# Altium PCB rhd2132_20250418.PcbDoc
Units mm, origin at the board's own origin, x right, y up, seen from the top; angles counter-clockwise.
Board outline 13 x 14.5 mm, 6 copper layers (Top Layer, GND1, sig1, PWR, GND2, Bottom Layer), stack 0.958 mm thick; 57 components, 57 nets, 310 pads, 151 vias.
Unrouted connection lines stored in the file: 21.
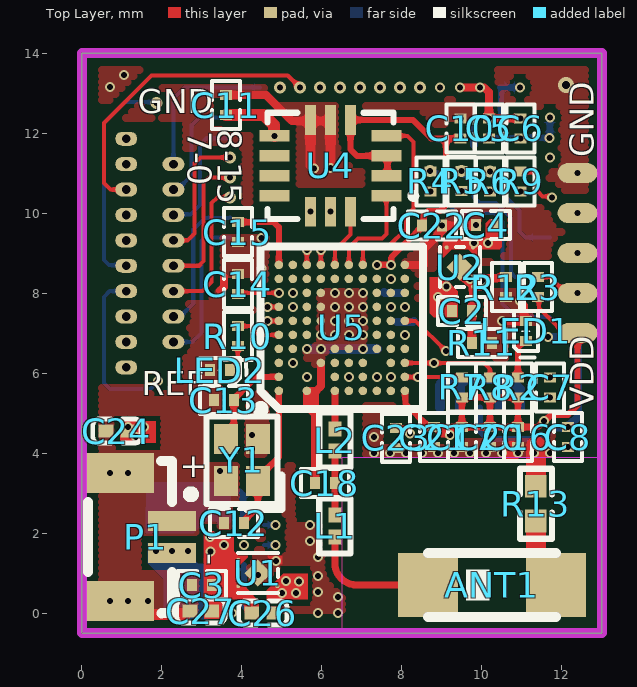
[diagram p0: Top Layer view]
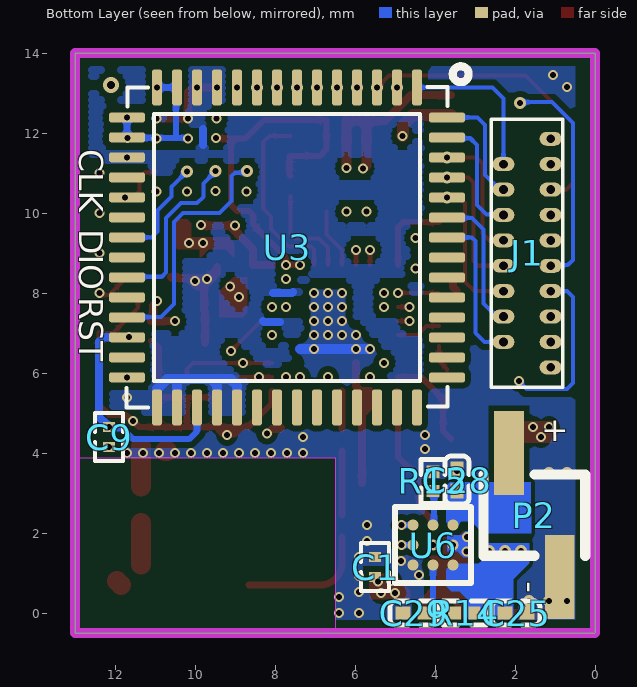
[diagram p1: Bottom Layer view, seen from below]
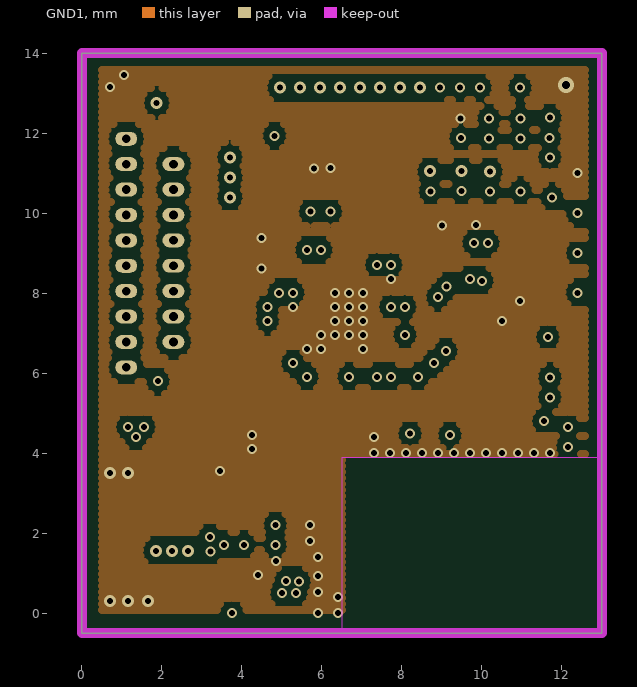
[diagram p2: GND1]
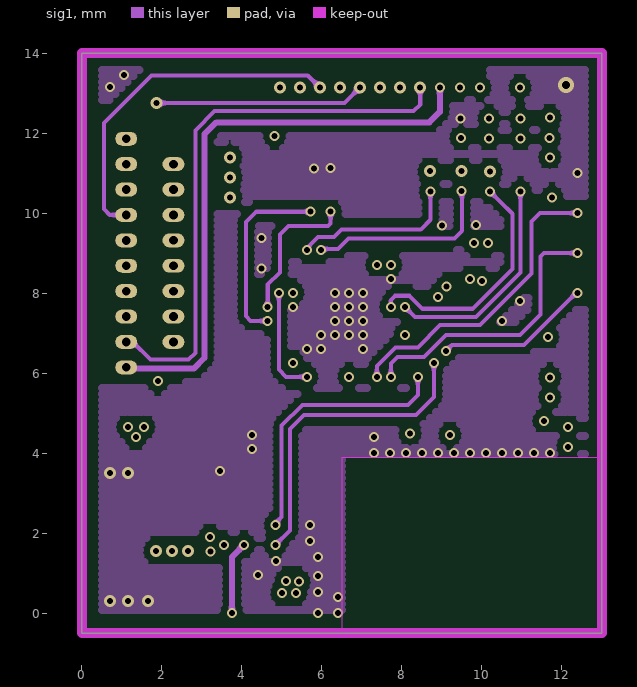
[diagram p3: sig1]
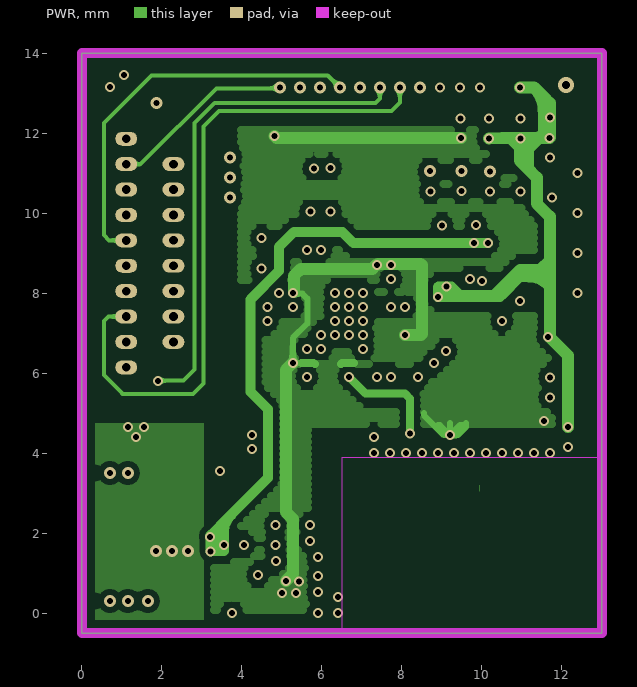
[diagram p4: PWR]
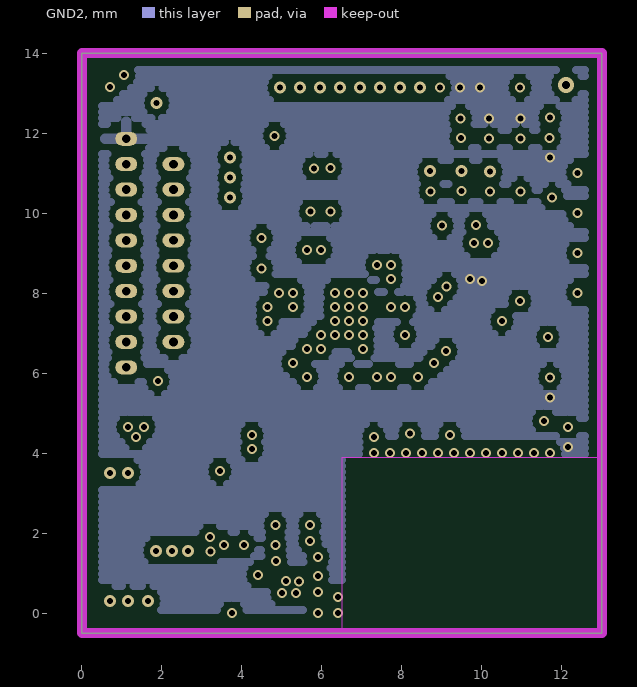
[diagram p5: GND2]
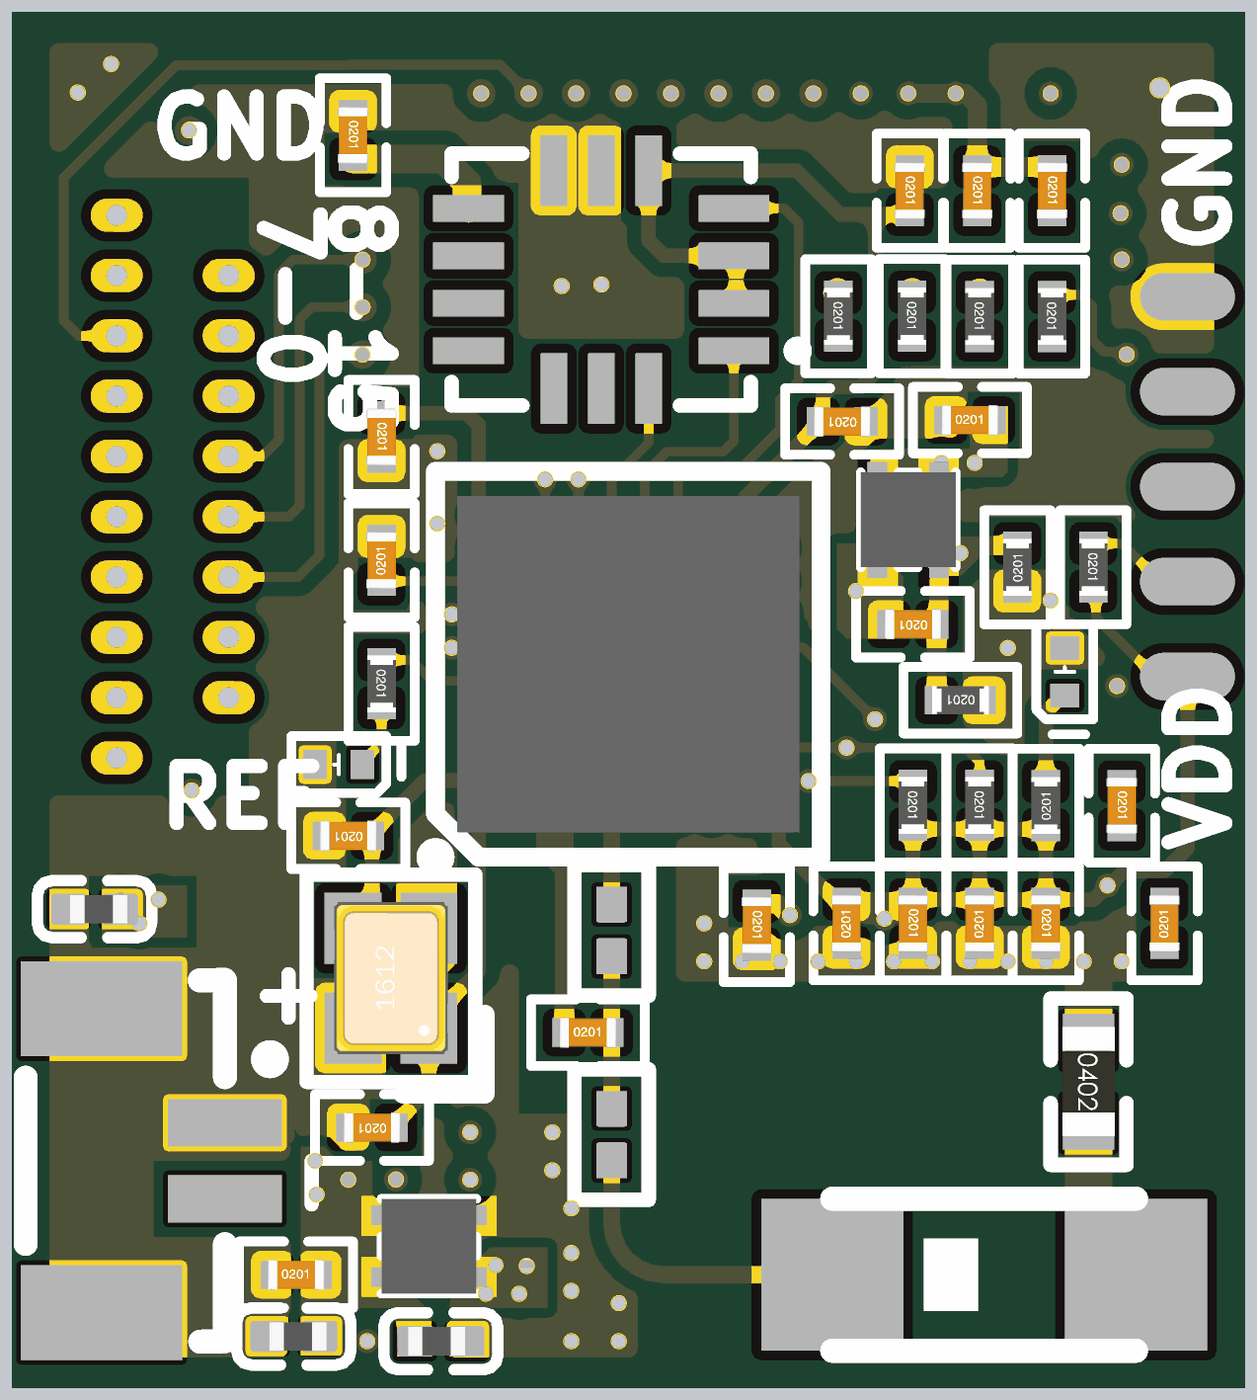
[diagram p6: 3D render of the assembled board from above, using the file's embedded part models]
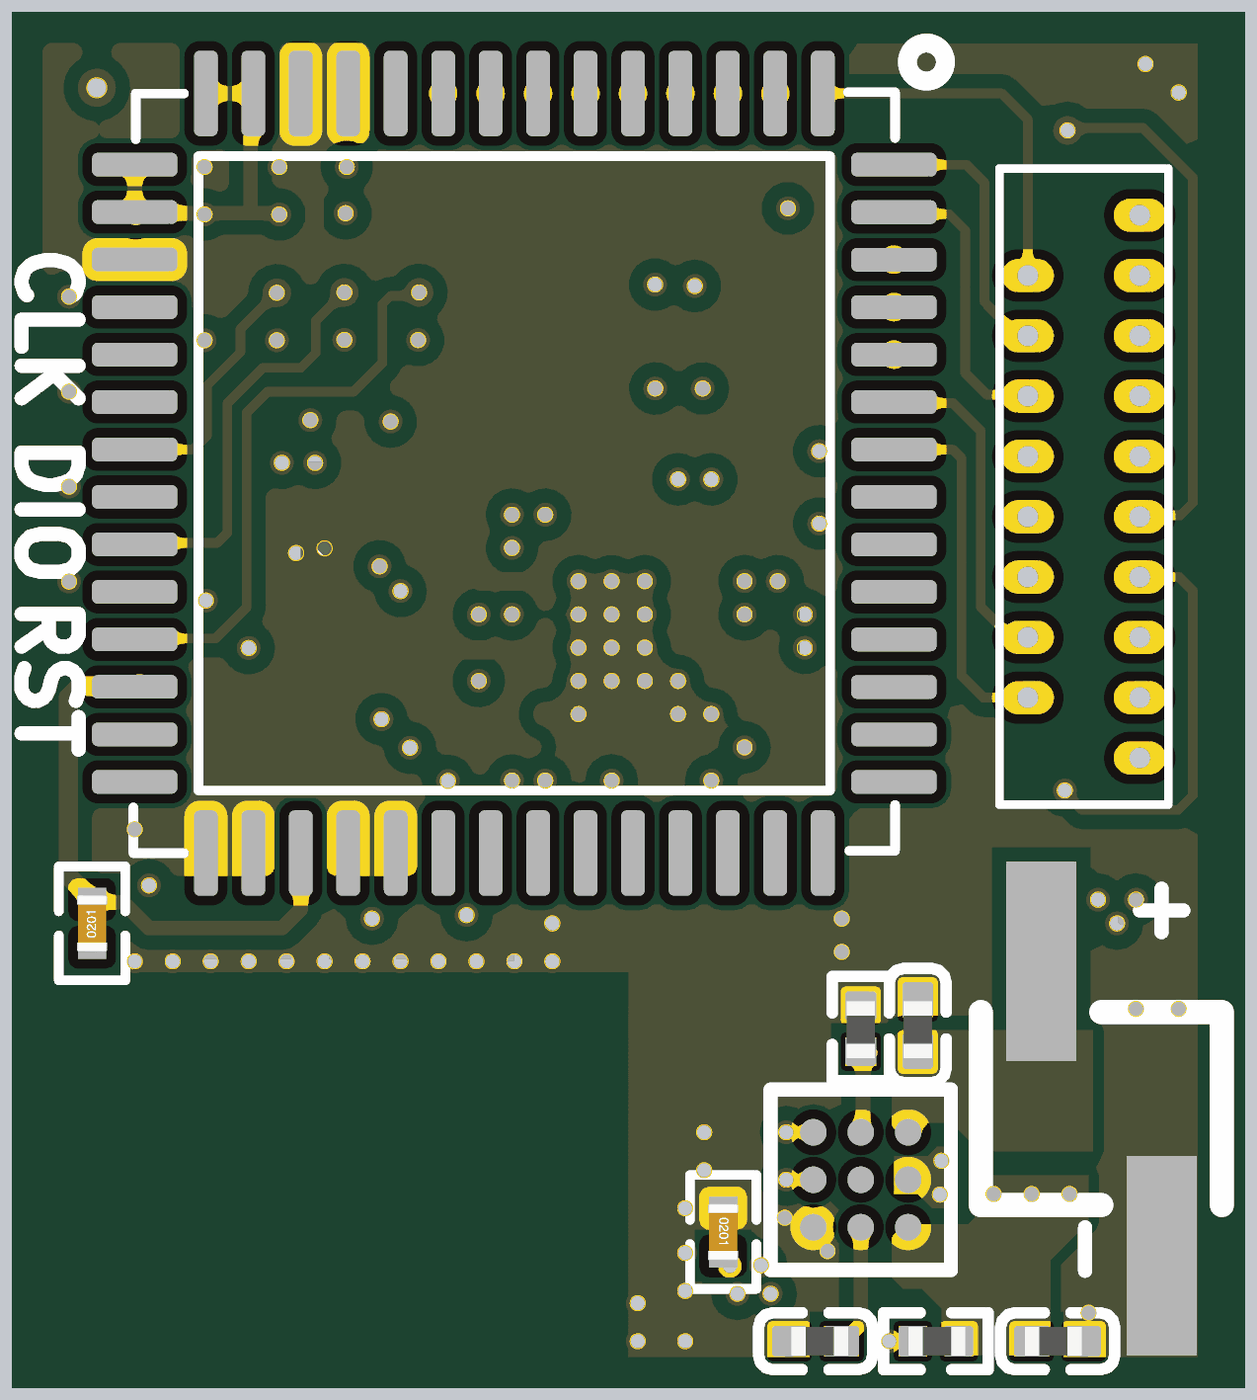
[diagram p7: 3D render of the assembled board from below, using the file's embedded part models]

## Layer stack, top to bottom
Top Solder: solder mask 0.0102, Solder Resist, Dk 3.5
Top Layer: signal copper 0.0356
Dielectric 2: prepreg 0.0711, PP-006, Dk 4.1
GND1: signal copper 0.035
Dielectric 6: prepreg 0.0711, PP-006, Dk 4.1
sig1: signal copper 0.035
Dielectric 4: prepreg 0.0711, PP-006, Dk 4.1
Dielectric 1: dielectric 0.32, FR-4, Dk 4.8
Dielectric 5: prepreg 0.0711, PP-006, Dk 4.1
PWR: signal copper 0.035
Dielectric 7: prepreg 0.0711, PP-006, Dk 4.1
GND2: signal copper 0.035
Dielectric 3: prepreg 0.0711, PP-006, Dk 4.1
Bottom Layer: signal copper 0.0356
Bottom Solder: solder mask 0.0102, Solder Resist, Dk 3.5

## Board outline
0,-0.5 13,-0.5 13,14 0,14

## Design rules (kind name [scope] priority, off if disabled: settings)
Clearance Clearance_1 [All vs IsKeepOut] p1: gap=0.2 ignorepadtopadclearanceinfootprint=FALSE
Clearance [All] p2: gap=0.102 ignorepadtopadclearanceinfootprint=FALSE except(0.1: Via-Via; 0.15: Arc-Poly Track-Poly SMDPad-Poly THPad-Poly Via-Poly Poly-Poly)
DiffPairsRouting [All] p1: maxlimit=0.254 minlimit=0.203 mostfreqgap=0.203 toplayer_minwidth=0.152 toplayer_maxwidth=0.508 toplayer_prefwidth=0.381 midlayer1_minwidth=0.152 midlayer1_maxwidth=0.508 midlayer1_prefwidth=0.381 midlayer2_minwidth=0.152 midlayer2_maxwidth=0.508 midlayer2_prefwidth=0.381 midlayer3_minwidth=0.152 midlayer3_maxwidth=0.508 midlayer3_prefwidth=0.381 midlayer4_minwidth=0.152 midlayer4_maxwidth=0.508 midlayer4_prefwidth=0.381 bottomlayer_minwidth=0.152 bottomlayer_maxwidth=0.508 bottomlayer_prefwidth=0.381 maxuncoupledlength=12.7
HoleToHoleClearance [All] p1: gap=0.152 allowstackedmicrovias=TRUE
MinimumSolderMaskSliver [All] p1: minsoldermaskwidth=0
PlaneConnect [All] p1: planeconnectstyle=Direct reliefexpansion=0.508 reliefentries=4 reliefconductorwidth=0.254 reliefairgap=0.254
PolygonConnect [All] p1: thpad.connectstyle=Relief thpad.reliefconductorwidth=0.254 thpad.reliefentries=4 thpad.polygonreliefangle="90 Angle" thpad.airgapwidth=0.254 smdpad.connectstyle=Direct smdpad.reliefconductorwidth=0.254 smdpad.reliefentries=4 smdpad.polygonreliefangle="90 Angle" smdpad.airgapwidth=0.254 via.connectstyle=Direct via.reliefconductorwidth=0.254 via.reliefentries=4 via.polygonreliefangle="90 Angle" via.airgapwidth=0.254
RoutingVias [All] p1: holewidth=0.711 width=1.27 viastyle="Through Hole" minholewidth=0.1 minwidth=0.2 maxholewidth=0.711 maxwidth=1.27
SilkToSilkClearance [All] p1: silktosilkclearance=0
SilkToSolderMaskClearance [IsPad] p1: minsilkscreentomaskgap=0 clearancetoexposedcopper=TRUE
SolderMaskExpansion [All] p1: expansion=0.102
Width [All] p1: maxlimit=2.54 minlimit=0.102 preferedwidth=0.381
24 further rules are at their usual default settings.

## Classes and differential pairs
component class IMU: C10 C11 U4
component class rhd2132: C5 C6 C7 C8 C9 J1 U3
component class Power: C1 C2 C3 C4 C24 C25 C26 C27 C28 C29 LED1 P1 P2 R2 R11 R12 R13 R14 R15 u1 U2 U6
component class nrf52840_wlcsp: ANT1 C12 C13 C14 C15 C16 C17 C18 C20 C21 C22 C23 L1 L2 LED2 R3 R4 R5 R6 R7 R8 R9 R10 U5 Y1

## Components (designator, comment, footprint, x,y, rotation, side; value= is the part's Value field where it differs from the comment)
ANT1 "ANT1" ANT-SMD_2P-L3.20-W1.60 10.25,0.7 r0 top
C1 "1uF" "C 0201_L" 5.5,1.15 r270 bottom
C2 "1uF" "C 0201_L" 9.5,7.55 r180 top
C3 "1uF" "C 0201_L" 3,0.7 r0 top
C4 "1uF" "C 0201_L" 10.1,9.7 r0 top
C5 "0.1uF/16V" "C 0201_L" 10.177,12.116 r270 top
C6 "1uF/16V" "C 0201_L" 10.965,12.116 r270 top
C7 "10nF" "C 0201_L" 11.7,5.641 r270 top
C8 "0.1uF/16V" "C 0201_L" 12.15,4.4 r90 top
C9 "0.1uF/16V" "C 0201_L" 12.15,4.4 r90 bottom
C10 "100nF" "C 0201_L" 9.466,12.116 r270 top
C11 "100nF" "C 0201_L" 3.6,12.7 r270 top
C12 "12pF" "C 0201_L" 3.8,2.25 r180 top
C13 "12pF" "C 0201_L" 3.55,5.323 r180 top
C14 "1.0uF" "C 0201_L" 3.9,8.224 r90 top
C15 "0.1uF" "C 0201_L" 3.9,9.523 r270 top
C16 "0.1uF" "C 0201_L" 10.9,4.4 r270 top
C17 "1.0uF" "C 0201_L" 9.5,4.4 r270 top
C18 "1.0pF" "C 0201_L" 6.075,3.25 r0 top
C20 "4.7uF" "C 0201_L" 10.203,4.4 r90 top
C21 "0.1uF" "C 0201_L" 8.8,4.4 r90 top
C22 "0.1uF" "C 0201_L" 8.754,9.685 r180 top
C23 "820pF" "C 0201_L" 7.854,4.382 r270 top
C24 "4.7uF" 0201(C) 1.15,4.55 r180 top
C25 "0.1uF" 0201(C) 2.25,0 r180 bottom
C26 "4.7uF" 0201(C) 4.25,0 r0 top
C27 "0.1uF" 0201(C) 3.25,0.05 r180 top
C28 "2.2uF/35V" 0201(C) 3.45,3.05 r90 bottom
C29 "0.1uF" 0201(C) 4.251,0 r0 bottom
J1 "B79038" B79038 1.7,9 r270 bottom
L1 "4.7nH" L0201 6.325,2.176 r270 top
L2 "4.7nH" L0201 6.325,4.326 r270 top
LED1 "RED" "LED-SMD_L0.7-W0.4-RD_BLUE - duplicate" 11.1,7.05 r90 top
LED2 "RED" "LED-SMD_L0.7-W0.4-RD_BLUE - duplicate" 3.45,6.073 r180 top
P1 "power" "CONN-SMD_SM02B-SURS-TF-LF-SN - duplicate" 1.35,1.9 r270 top
P2 "power" HDR-SMD_2P-P1.27-V-M-LS4.2-R1 1.515,2.45 r0 bottom
R2 "10K" "R 0201_L" 10.9,5.641 r90 top
R3 "100K" "R 0201_L" 11.4,8.15 r270 top
R4 "33o" "R 0201_L" 8.714,10.793 r270 top
R5 "33o" "R 0201_L" 9.492,10.795 r270 top
R6 "33o" "R 0201_L" 10.203,10.791 r270 top
R7 "10K" "R 0201_L" 9.5,5.643 r270 top
R8 "10K" "R 0201_L" 10.203,5.643 r270 top
R9 "33o" "R 0201_L" 10.965,10.791 r270 top
R10 "10K" "R 0201_L" 3.9,6.923 r270 top
R11 "0R" "R 0201_L" 10,6.75 r180 top value=10K
R12 "0R" "R 0201_L" 10.6,8.15 r90 top value=10K
R13 "0R" 0402(R) 11.35,3.166 r270 top value=10K
R14 "NC" 0201(R) 3.017,0 r0 bottom value=100
R15 "NTC-10K" 0201(R) 4.05,3.05 r90 bottom value=100
U1 "TPS7A2033PDQNR" X2SON-0.4 4.4,1 r180 top
U2 "TPS7A2033PDQNR" X2SON-0.4 9.45,8.65 r90 top
U3 "RHD2132" QFN-56-9mm 4.45,13.14 r270 bottom locked
U4 "LSM6DS3TR" LAG-14 7.613,10.43 r180 top
U5 "NRF52840-CKAA-R7" BGA94C35P10X10_354X361X51 6.5,7.129 r90 top
U6 "MP2710GC-0000" WLCSP3*3-P0.5mm 4.05,1.7 r270 bottom
Y1 "32MHz" "OSC 1612-4P" 4,3.823 r90 top

## Footprints (in the part's own frame and the unit in brackets; to place one, negate y for a bottom-side part, rotate by r counter-clockwise, add the part's x,y. Pads: shape width x height; smd on the part's side, far side on the other; paste and mask are expansions set on the pad)
0201(C) [mm]
  rect 0.368x0.324 smd paste-100 mask+0.051: 1(0,0) 2(0.549,0)
  silkscreen extent -0.33,-0.3 0.88,0.3, body extent -0.07,-0.15 0.53,0.15, height 0.33
0201(R) [mm]
  rect 0.303x0.324 smd paste-100 mask+0.051: 1(0,0) 2(0.483,0)
  silkscreen extent -0.31,-0.3 0.79,0.3, body extent -0.07,-0.15 0.53,0.15, height 0.33
0402(R) [mm]
  rect 0.566x0.54 smd mask+0.051: 1(0,0) 2(0.866,0)
  silkscreen extent -0.44,-0.4 1.31,0.4, body extent -0.14,-0.27 1.01,0.28, height 0.41
ANT-SMD_2P-L3.20-W1.60 [mm]
  rect 1.5x1.6 smd: 1(-1.6,0) 2(1.6,0)
  silkscreen extent -1.6,-0.8 1.6,0.8
B79038 [mm]
  oval 0.35x0.55 hole 0.22: 1(-2.857,0.59) 2(-2.222,-0.59) 3(-2.222,0.59) 4(-1.588,-0.59) 5(-1.587,0.59) 6(-0.953,-0.59) 7(-0.952,0.59) 8(-0.318,-0.59) 9(-0.317,0.59) 10(0.317,-0.59) 11(0.318,0.59) 12(0.952,-0.59) 13(0.953,0.59) 14(1.588,-0.59) 15(1.588,0.59) 16(2.223,-0.59) 17(2.223,0.59) 18(2.858,0.59)
  silkscreen extent -3.35,-0.89 3.35,0.89
BGA94C35P10X10_354X361X51 [mm]
  round 0.212 smd mask+0.025: A1(-1.575,1.575) A2(-1.225,1.575) A3(-0.875,1.575) A4(-0.525,1.575) A5(-0.175,1.575) A6(0.175,1.575) A7(0.525,1.575) A8(0.875,1.575) A9(1.225,1.575) A10(1.575,1.575) B3(-0.875,1.225) B4(-0.525,1.225) B5(-0.175,1.225) B6(0.175,1.225) B7(0.525,1.225) B8(0.875,1.225) B9(1.225,1.225) B10(1.575,1.225) C1(-1.575,0.875) C2(-1.225,0.875) C4(-0.525,0.875) C5(-0.175,0.875) C6(0.175,0.875) C7(0.525,0.875) C8(0.875,0.875) C9(1.225,0.875) C10(1.575,0.875) D3(-0.875,0.525) D4(-0.525,0.525) D5(-0.175,0.525) D6(0.175,0.525) D7(0.525,0.525) D8(0.875,0.525) D9(1.225,0.525) D10(1.575,0.525) E1(-1.575,0.175) E2(-1.225,0.175) E3(-0.875,0.175) E4(-0.525,0.175) E5(-0.175,0.175) E6(0.175,0.175) E7(0.525,0.175) E8(0.875,0.175) E9(1.225,0.175) E10(1.575,0.175) F1(-1.575,-0.175) F2(-1.225,-0.175) F3(-0.875,-0.175) F4(-0.525,-0.175) F5(-0.175,-0.175) F6(0.175,-0.175) F7(0.525,-0.175) F8(0.875,-0.175) F9(1.225,-0.175) F10(1.575,-0.175) G1(-1.575,-0.525) G2(-1.225,-0.525) G3(-0.875,-0.525) G4(-0.525,-0.525) G5(-0.175,-0.525) G6(0.175,-0.525) G7(0.525,-0.525) G8(0.875,-0.525) G9(1.225,-0.525) G10(1.575,-0.525) H1(-1.575,-0.875) H2(-1.225,-0.875) H4(-0.525,-0.875) H5(-0.175,-0.875) H6(0.175,-0.875) H7(0.525,-0.875) H8(0.875,-0.875) H9(1.225,-0.875) H10(1.575,-0.875) J1(-1.575,-1.225) J2(-1.225,-1.225) J3(-0.875,-1.225) J4(-0.525,-1.225) J5(-0.175,-1.225) J6(0.175,-1.225) J7(0.525,-1.225) J8(0.875,-1.225) J9(1.225,-1.225) J10(1.575,-1.225) K1(-1.575,-1.575) K2(-1.225,-1.575) K3(-0.875,-1.575) K4(-0.525,-1.575) K5(-0.175,-1.575) K6(0.175,-1.575) K7(0.525,-1.575) K8(0.875,-1.575) K9(1.225,-1.575) K10(1.575,-1.575)
  silkscreen extent -2.13,-2.03 2.03,2.13, body extent -1.77,-1.8 1.77,1.8, height 0.51
"C 0201_L" [mm] "无极性贴片电容                               淘宝ID:黄晶宝石"
  rect 0.25x0.3 smd: 1(-0.25,0) 2(0.25,0)
  silkscreen extent -0.6,-0.35 0.6,0.35, body extent -0.3,-0.16 0.3,0.16, height 0.31
"CONN-SMD_SM02B-SURS-TF-LF-SN - duplicate" [mm]
  rect 1x1.7 smd paste+0 mask+0.051: 0(-1.6,-0.4) 0(1.6,-0.4)
  rect 0.5x1.2 smd paste+0 mask+0.051: 1(-0.4,0.9) 2(0.4,0.9)
  silkscreen extent -1.91,-1.2 1.91,1.47
HDR-SMD_2P-P1.27-V-M-LS4.2-R1 [mm]
  rect 0.74x2.1 smd mask+0: 1(-0.635,1.55) 2(0.635,-1.55)
  silkscreen extent -1.27,-1.02 1.27,1.02
L0201 [mm]
  rect 0.368x0.324 smd mask+0.051: 1(-0.274,0) 2(0.274,0)
  silkscreen extent -0.69,-0.39 0.69,0.39
LAG-14 [mm]
  rect 0.745x0.28 smd: 1(0,0) 2(0,-0.5) 3(0,-1) 4(0,-1.5) 8(2.795,-1.5) 9(2.795,-1) 10(2.795,-0.5) 11(2.795,0)
  rect 0.28x0.745 smd: 5(0.898,-1.898) 6(1.398,-1.898) 7(1.898,-1.898) 12(1.898,0.397) 13(1.398,0.397) 14(0.898,0.397)
  silkscreen extent -0.75,-2.08 2.97,0.58
"LED-SMD_L0.7-W0.4-RD_BLUE - duplicate" [mm]
  rect 0.25x0.305 smd mask+0.05: 1(-0.25,0) 2(0.25,0)
  silkscreen extent -0.66,-0.3 0.5,0.3
"OSC 1612-4P" [mm] "1.6*1.2*0.35mm（长宽高）                    淘宝ID:黄晶宝石"
  rect 0.75x0.6 smd: 1(-0.525,-0.4) 2(0.525,-0.4) 3(0.525,0.4) 4(-0.525,0.4)
  silkscreen extent -1.22,-0.99 1.09,0.89, body extent -0.8,-0.6 0.8,0.6, height 0.35
QFN-56-9mm [mm]
  rrect50% 0.9x0.25 smd: 1(0,0) 2(0,-0.5) 3(0,-1) 4(0,-1.5) 5(0,-2) 6(0,-2.5) 7(0,-3) 8(0,-3.5) 9(0,-4) 10(0,-4.5) 11(0,-5) 12(0,-5.5) 13(0,-6) 14(0,-6.5) 29(8,-6.5) 30(8,-6) 31(8,-5.5) 32(8,-5) 33(8,-4.5) 34(8,-4) 35(8,-3.5) 36(8,-3) 37(8,-2.5) 38(8,-2) 39(8,-1.5) 40(8,-1) 41(8,-0.5) 42(8,0)
  rrect50% 0.25x0.9 smd: 15(0.75,-7.25) 16(1.25,-7.25) 17(1.75,-7.25) 18(2.25,-7.25) 19(2.75,-7.25) 20(3.25,-7.25) 21(3.75,-7.25) 22(4.25,-7.25) 23(4.75,-7.25) 24(5.25,-7.25) 25(5.75,-7.25) 26(6.25,-7.25) 27(6.75,-7.25) 28(7.25,-7.25) 43(7.25,0.75) 44(6.75,0.75) 45(6.25,0.75) 46(5.75,0.75) 47(5.25,0.75) 48(4.75,0.75) 49(4.25,0.75) 50(3.75,0.75) 51(3.25,0.75) 52(2.75,0.75) 53(2.25,0.75) 54(1.75,0.75) 55(1.25,0.75) 56(0.75,0.75)
  silkscreen extent -0.53,-7.26 8,1.29
"R 0201_L" [mm] "1/20W贴片电阻        淘宝ID:黄晶宝石"
  rect 0.25x0.3 smd: 1(-0.25,0) 2(0.25,0)
  silkscreen extent -0.6,-0.35 0.6,0.35, body extent -0.3,-0.15 0.3,0.15, height 0.23
WLCSP3*3-P0.5mm [mm]
  round 0.28 smd: A1(-0.5,0.5) A2(0,0.5) A3(0.5,0.5) B1(-0.5,0) B2(0,0) B3(0.5,0) C1(-0.5,-0.5) C2(0,-0.5) C3(0.5,-0.5)
  silkscreen extent -0.95,-0.95 0.95,0.95
X2SON-0.4 [mm]
  round 0.1 smd mask+0: 1(-0.49,0.33) 2(-0.49,-0.33) 3(0.49,-0.33) 4(0.49,0.33)
  rect 0.48x0.48 smd rot 45: 2(0,0)
  Top Layer region: -0.61,0.22 -0.61,0.43 -0.25,0.43 -0.25,0.4 -0.43,0.22
  Top Layer region: 0.61,0.22 0.61,0.43 0.25,0.43 0.25,0.4 0.43,0.22
  Top Layer region: -0.61,-0.22 -0.61,-0.43 -0.25,-0.43 -0.25,-0.4 -0.43,-0.22
  Top Layer region: 0.61,-0.22 0.61,-0.43 0.25,-0.43 0.25,-0.4 0.43,-0.22
  silkscreen extent -0.5,-0.5 0.5,0.5, body extent -0.5,-0.5 0.5,0.5, height 0.34

## Part data
ANT1: "PCB板载天线", BOM名称=PCB板载天线, 技术支持，联系售后=https://shop463601444.taobao.com, 版权归属="封装库来自淘宝 ID：黄晶宝石"
C1 C2 C3 C4 C5 C6 C7 C8 C9 C10 C11 C18: library part C, "贴片电容", BOM名称=无极性贴片电容
C12 C13: library part "CAP CER 12PF 50V C0G/NP0 0402", "CAP CER 12PF 50V C0G/NP0 0402", Manufacturer=YAGEO, Manufacturer Part Number=CC0402GRNPO9BN120, Package=0402, Supplier Part Number 1=311-3609-1-ND, Height=0.55mm, Supplier 1=Digi-Key
C14 C17: library part "CAP CER 1UF 16V X7R 0603", "CAP CER 1UF 16V X7R 0603", Manufacturer=KEMET, Manufacturer Part Number=C0603C105K4RAC7867, Package=0402, Supplier Part Number 1=399-C0603C105K4RAC7867CT-ND, Height=0.9mm, Supplier 1=Digi-Key
C15 C16 C21 C22: library part "CAP CER 0.1UF 6.3V X7R 0201", "CAP CER 0.1UF 6.3V X7R 0201", Manufacturer=YAGEO, Manufacturer Part Number=CC0201KRX7R5BB104, Package=0402, Supplier Part Number 1=13-CC0201KRX7R5BB104CT-ND, Height=0.33mm, Supplier 1=Digi-Key
C20: library part "CAP CER 4.7UF 6.3V X7R 0603", "CAP CER 4.7UF 6.3V X7R 0603", Manufacturer="Taiyo Yuden", Manufacturer Part Number=JMK107BB7475KA-T, Package=0402, Supplier Part Number 1=587-5870-1-ND, Height=1.0mm, Supplier 1=Digi-Key
C23: library part "CAP CER 820PF 25V X7R 0201", "CAP CER 820PF 25V X7R 0201", Manufacturer=YAGEO, Manufacturer Part Number=CC0201KRX7R8BB821, Package=0201, Supplier Part Number 1=311-3698-1-ND, Height=0.33mm, Supplier 1=Digi-Key
C24 C25 C26 C27 C28 C29: library part CAP
J1: library part CON_A79015-001-18PIN, LatestRevisionDate=17-Jul-2002, LatestRevisionNote="Re-released for DXP Platform.", Publisher="Altium Limited"
L1 L2: library part L, "小功率贴片电感", BOM名称=小功率贴片电感
LED1 LED2: library part LED-SMD, "贴片LED", BOM名称=贴片LED, Color=RED
R2 R3 R4 R5 R6 R7 R8 R9 R10 R11 R12: library part R, "贴片电阻", BOM名称=贴片电阻
R13: library part R, "贴片电阻 OR", BOM名称=贴片电阻
R14 R15: library part "Res Semi", "Semiconductor Resistor", LatestRevisionDate=17-Jul-2002, LatestRevisionNote="Re-released for DXP Platform.", PackageDescription="Axial Device, Thru-Hole; 2 Leads; 0.5 in Pin Spacing", PackageReference=AXIAL-0.5, Published=8-Jun-2000, Publisher="Altium Limited"
U1 U2: library part IC_TPS7A2033PDQNR, "TPS7A2033PDQNR/X2SON"
U5: "Advanced Bluetooth 5, Thread and Zigbee multiprotocol SoC", Manufacturer="Nordic Semiconductor", Supplier Part Number 1=949-NRF52840-CKAA-R7, Category="RF Receivers, Transceivers", Manufacturer Part Number=NRF52840-CKAA-R7, Pricing 1="1=6.69000, 10=6.04000, 50=5.76000, 100=5.00000, 1000=5.00000, 10000=5.00000 (USD)", RoHS=Yes, Supplier 1=Mouser
U6: library part MP2710
Y1: library part XTAL_ECS-320-8-37BQ-CKY-TR, "Crystal 32MHz 8pF ±10ppm ±10ppm 4-Pin Miniature CSMD T/R", Manufacturer="ECS International", Manufacturer Part Number=ECS-320-8-37BQ-CKY-TR, Supplier Part Number 1=50-ECS-320-8-37BQ-CKY-CT-ND, Pricing 1="1=0.57000, 10=0.47700, 50=0.42960, 100=0.38180, 500=0.36270 (USD)", RoHS=No, Stock 1=8978, Supplier 1=Digi-Key

## Free pads (board coordinates)
  oval 1x0.5 smd: 2(12.393,7) 2(12.393,8) 2(12.393,9) 2(12.393,10) 2(12.393,11)

## Via types
v1: diameter 0.25, hole 0.15, Top Layer to Bottom Layer, tented both sides, 127 vias
v2: diameter 0.3, hole 0.15, Top Layer to Bottom Layer, tented both sides, 23 vias
v3: diameter 0.4, hole 0.2, Top Layer to Bottom Layer, tented both sides, 1 vias

## Nets (pads, with @x,y where several pads share a name; then routed paths per layer and width w, separated by ;. In a path a pad name is that pad's centre, name@x,y a point inside that pad or via, vN(x,y) a via of type N, cw(c..) or ccw(c..) an arc to the next point about the centre after c; other vN are vias at no path point)
+3V3: C1.2 C10.2 C11.2 C16.1 C17.1 C20.2 C21.2 C22.2 pad.2@12.393,7 R2.1 R3.2 R7.2 R8.2 U1.1 U4.2 U4.3 U4.5 U4.8 U5.B3 U5.B8 U5.H10 U5.J10 U5.K1 U5.K5 | length 46.8
  Top Layer w0.102: R3.2@11.425,7.9 R3.2 11.427,7.873 11.427,7.623 12.05,7 pad.2@12.393,7
  Top Layer w0.152: v1(7.375,8.704) v1(7.725,8.704) 7.714,8.715 7.72,8.715 7.736,8.732 7.736,8.893 8.504,9.66 C22.2 8.553,9.734 8.553,9.953 8.65,10.05 8.95,10.05 9.1,10.2 9.1,11.866 ; U4.2 7.637,10.955 7.637,11.43 U4.3 6.875,11.431 6.715,11.59 U4.5 8.272,12.328 8.734,11.866 9.1,11.866 ; U5.K1 8.086,5.543 8.086,5.239 8.675,4.65 8.7,4.65 C21.2@8.825,4.65 ; 9.15,4.573 9.121,4.601 C21.2@8.874,4.601 ; C17.1@9.35,4.55 9.25,4.65 C21.2@8.825,4.65 ; v1(9.478,11.878) C10.2 9.1,11.866 ; C16.1 C20.2 ; R2.1 C16.1 11.4,4.65 v1(11.55,4.8) 11.576,4.8 11.73,4.953 12.15,4.953 12.393,5.196 ; R2.1 R2.1 R8.2@10.204,5.392 ; 12.393,5.193 12.393,5.196 ; pad.2@12.393,7 12.393,5.196 ; C21.2@8.825,4.65 C17.1@9.475,4.65 ; C21.2@8.825,4.65 C21.2@8.874,4.601 ; C21.2@8.825,4.65 C21.2 8.849,4.601 C21.2@8.874,4.601 ; C21.2@8.874,4.601 9.006,4.469 9.181,4.469 v1(9.2,4.45) 9.219,4.469 9.294,4.469 C17.1@9.475,4.65 ; C17.1@9.475,4.65 C17.1 ; C17.1 C20.2 ; C17.1 R7.2 R8.2 ; C20.2 R8.2
  Top Layer w0.3: C11.2 4.55,12.45 4.8,12.2 U4.8@4.8,12 ; U4.8@4.808,11.94 v1(4.817,11.931) ; 4.97,0.67 v1(5.1,0.8)
  PWR w0.152: v1(5.275,6.254) 5.275,6.877 5.637,7.239 5.637,7.861 5.513,7.985 5.294,7.985 v1(5.275,8.004) ; 8.55,5 8.55,4.95 8.9,4.6 ; 8.9,4.7 8.9,4.6 ; 8.95,4.7 v1(9.2,4.45) ; 9.2,4.75 v1(9.2,4.45) ; 9.5,4.7 9.45,4.7 v1(9.2,4.45) ; 9.6,4.75 9.6,4.65 9.4,4.45 v1(9.2,4.45) ; 8.9,4.6 9.05,4.45 v1(9.2,4.45)
  PWR w0.2: 5.49,6.254 5.791,6.254 5.823,6.223 ; 6.477,6.223 6.505,6.25 6.8,6.25
  PWR w0.3: v1(4.817,11.931) 4.87,11.878 v1(9.478,11.878) ; v1(5.1,0.8) 5.275,0.975 5.275,2.35 5.1,2.525 5.1,6.079 v1(5.275,6.254) ; v1@5.302,8.031 5.302,8.43 5.478,8.606 7.26,8.606 7.359,8.704 v1(7.375,8.704) 7.402,8.731 8.469,8.731 8.5,8.7 ; v1(8.075,6.954) 8.481,6.954 8.5,6.973 8.5,8.7 ; 8.446,8.704 8.45,8.7 ; 8.5,8.704 8.5,8.7
  other v1: 5,0.5 5.35,0.5 5.43,0.792
ANT: L2.1 U5.E1 | length 1
  Top Layer w0.178: L2.1 U5.E1
BAT_INT: R14.2 U6.B2 | length 2.1
  sig1 w0.152: v1(3.75,0) 3.75,1.4 v1@4.05,1.7 ; v1@4.049,1.701 4.051,1.703 v1(4.053,1.703)
  Bottom Layer w0.152: R14.2 v1(3.75,0)
GND: C1.1 C3.1 C4.1 C10.1 C11.1 C12.2 C13.2 C14.2 C15.2 C16.2 C17.2 C18.1 C20.1 C21.1 C22.1 C23.2 C24.2 C25.2 C26.2 C27.2 C28.2 C29.2 LED1.2 LED2.2 P1.0 P1.1 P2.1 pad.2@12.393,11 R11.1 R12.1 R13.1 R15.2 U1.2 U4.6 U4.7 U5.B7 U5.C1 U5.C4 U5.D3 U5.D4 U5.D5 U5.D6 U5.D7 U5.D8 U5.E4 U5.E5 U5.E6 U5.E7 U5.E8 U5.F4 U5.F5 U5.F6 U5.F7 U5.F8 U5.G4 U5.G5 U5.G6 U5.G7 U5.G8 U5.J9 U5.K10 U6.C3 Y1.2 Y1.4 | length 19.6
  Top Layer w0.102: C22.1@9.004,9.66 v1(9.004,9.685)
  Top Layer w0.2: 3.458,8.061 3.55,8.153 3.55,8.4 ; C11.1 4.6,12.95 5.25,12.3 5.715,12.3 6.187,12.3 U4.6 ; 5.75,5.5 5.75,5.1 5.725,5.075 ; 5.8,5.5 5.825,5.475 5.825,4.975 ; C18.1 5.825,4.975 ; U5.D3 5.975,5.671 5.86,5.556 5.627,5.556 U5.C1 5.627,5.552 5.627,5.173 5.725,5.075 ; U5.K10 8.55,8.704 8.55,9.1 9.004,9.554 C22.1@9.004,9.66 ; v1(9.004,9.685) C4.1@9.85,9.685 ; C10.1@9.45,12.382 v1(9.466,12.366) C10.1@9.468,12.364 ; v1@10.5,7.296 LED1.2@11.03,7.296 ; v1(10.95,7.8) 10.95,7.786 11.048,7.689 11.048,7.325 11.073,7.3 LED1.2@11.085,7.3 ; LED1.2@11.06,7.325 LED1.2@11.085,7.3 ; LED1.2 LED1.2@11.085,7.3 ; 5.725,5.075 5.825,4.975
  Top Layer w0.25: P1.0@0.95,0.3 1.298,-0.048 C27.2@2.6,-0.048 ; P1.0@1.45,0 1.477,-0.027 2.356,-0.027 2.396,0.013 2.664,0.013 C27.2
  Top Layer w0.254: U4.7 5.715,12.3 5.715,11.196 v1(5.798,11.113) ; U4.6 6.215,11.13 v1(6.218,11.128)
  Top Layer w0.5: 10.7,4.05 C16.2@10.75,4.05 ; R13.1 11.35,4.172
  Bottom Layer w0.254: v1@5.644,6.604 7.375,6.604
  other v1: 5.9,0 6.4,0 6.4,0.4 5.9,0.53 5.9,0.93 4.4,0.95 4.85,1.3 5.9,1.4 5.7,1.8 5.7,2.2 3.45,3.55 7.3,4 7.7,4 8.1,4 8.5,4 8.9,4 9.3,4 9.7,4 10.1,4 10.5,4 10.9,4 11.3,4 11.7,4 4.25,4.1 7.3,4.4 4.25,4.45 5.625,6.604 5.975,6.604 7.025,6.604 5.975,6.954 6.325,6.954 6.675,6.954 7.025,6.954 6.325,7.304 6.675,7.304 7.025,7.304 10.5,7.3 5.275,7.654 6.325,7.654 6.675,7.654 7.025,7.654 6.325,8.004 6.675,8.004 7.025,8.004 7.725,8.354 4.488,8.611 4.488,9.373 9.85,9.7 12.393,11 0.7,13.15 1.05,13.45
  other v2: 0.7,0.3 1.15,0.3 1.65,0.3 0.7,3.5 1.15,3.5
  other v3: 12.1,13.2
in0: J1.17 U3.9 | length 13.9
  sig1 w0.102: J1.17 1.273,6.777 1.711,6.339 2.669,6.339 2.836,6.506 2.836,12.066 3.317,12.548 8.295,12.548 8.46,12.713 8.46,13.13 v2(8.45,13.14)
in1: J1.15 U3.8 | length 16.7
  PWR w0.102: J1.15 0.662,7.412 0.55,7.3 0.55,5.95 1,5.5 ; v2(7.95,13.14) 7.95,12.767 7.736,12.552 3.426,12.552 3.04,12.166 3.04,5.74 2.78,5.48 1.02,5.48 ; 1,5.5 ccw(c1.02,5.5) 1.02,5.48 ; 1,5.5 1.02,5.48
in2: J1.13 U3.7 | length 16.6
  PWR w0.102: v1@1.93,5.81 2.536,5.81 2.819,6.093 2.819,12.253 3.322,12.756 7.338,12.756 7.45,12.869 v2(7.45,13.14)
  Bottom Layer w0.102: J1.13 0.697,8.047 0.55,7.9 0.55,5.75 0.704,5.596 1.716,5.596 v1@1.93,5.81
  other v1: 1.9,5.8
in3: J1.11 U3.6 | length 10.9
  sig1 w0.102: v2(1.872,12.751) 6.561,12.751 v2(6.95,13.14)
  Bottom Layer w0.102: J1.11@1.03,8.682 J1.11 1.095,8.698 0.683,8.698 0.55,8.83 0.55,12.251 1.076,12.776 1.846,12.776 v2(1.872,12.751)
in4: J1.9 U3.5 | length 9.9
  PWR w0.102: J1.9 0.683,9.317 0.55,9.45 0.55,12.251 1.736,13.437 3.903,13.437 3.909,13.443 6.148,13.443 v2(6.45,13.14)
in5: J1.7 U3.4 | length 8.8
  sig1 w0.102: J1.7 0.698,9.952 0.55,10.1 0.55,12.251 1.736,13.437 3.653,13.437 3.659,13.443 5.648,13.443 v2(5.95,13.14)
in6: J1.5 U3.3 | length 7.6
  Top Layer w0.102: J1.5 0.713,10.587 0.55,10.75 0.55,12.251 1.736,13.437 3.534,13.437 3.541,13.443 5.148,13.443 v2(5.45,13.14)
in7: J1.3 U3.2 | length 4.7
  PWR w0.102: J1.3@1.1,11.2 cw(c1.122,11.2) 1.122,11.222 1.464,11.222 3.361,13.119 4.929,13.119 v2(4.95,13.14)
in8: J1.2 U3.1 | length 3.9
  Bottom Layer w0.102: J1.2 2.29,12.864 2.566,13.14 2.64,13.14 U3.1
in9: J1.4 U3.56 | length 3
  Bottom Layer w0.102: J1.4 2.39,10.587 2.718,10.915 ; 2.7,10.9 2.746,10.946 2.746,12.196 ; 2.75,12.15 2.75,12.2 2.94,12.39 U3.56
in10: J1.6 U3.55 | length 3.1
  Bottom Layer w0.102: J1.6 2.305,9.967 2.717,9.967 2.95,10.2 2.95,11.7 3.12,11.87 3.68,11.87 U3.55
in11: J1.8 U3.54 | length 3.3
  Top Layer w0.102: J1.8@2.25,9.3 2.268,9.317 J1.8 2.642,9.317 2.818,9.494 2.818,11.242 2.966,11.39 v2(3.7,11.39)
in12: J1.10 U3.53 | length 3.5
  Top Layer w0.102: J1.10@2.25,8.65 2.282,8.682 J1.10 2.924,8.682 3.038,8.796 3.038,10.76 3.168,10.89 v2(3.7,10.89)
in13: J1.12 U3.52 | length 3.5
  Top Layer w0.102: J1.12@2.3,8.05 2.302,8.047 3.019,8.047 3.246,8.274 3.246,10.248 3.388,10.39 v2(3.7,10.39)
in14: J1.14 U3.51 | length 3.5
  Bottom Layer w0.102: J1.14@2.336,7.4 2.45,7.4 2.786,7.736 2.786,9.586 3.081,9.881 3.691,9.881 U3.51
in15: J1.16 U3.50 | length 3.9
  Bottom Layer w0.102: J1.16@2.25,6.8 2.272,6.777 J1.16 2.759,6.777 2.989,7.007 2.989,9.296 3.083,9.39 U3.50
LC_SCL: R8.1 U5.K3 U6.C2 | length 10.5
  Top Layer w0.102: U5.K3 8.077,6.252 8.798,6.252 v1(8.8,6.25) 10.053,6.25 10.203,6.1 R8.1
  sig1 w0.102: v1(4.835,1.7) 5.2,2.065 5.2,4.6 5.55,4.95 8.35,4.95 8.8,5.4 v1(8.8,6.25) v1@8.828,6.222
  Bottom Layer w0.102: U6.C2 v1@4.818,1.7
LC_SDA: R7.1 U5.K2 U6.C1 | length 8.4
  Top Layer w0.102: U5.K2 8.081,5.898 9.494,5.898 R7.1
  sig1 w0.102: v1(4.835,2.2) 4.835,2.24 4.996,2.402 4.996,4.684 5.512,5.2 8.15,5.2 8.4,5.45 v1(8.4,5.9)
  Bottom Layer w0.102: U6.C1 v1@4.818,2.2
LED1: R10.1 U5.A5 | length 1.1
  Top Layer w0.102: R10.1 4.215,7.173 4.434,6.954 U5.A5
lsm_CS: U4.12 U5.A6 | length 5
  Top Layer w0.102: v1@4.641,7.303 U5.A6
  sig1 w0.102: v1@4.657,7.302 v1(4.64,7.302) 4.221,7.302 4.1,7.423 4.1,9.773 4.36,10.033 v1(5.715,10.033)
lsm_int1: U4.4 U5.G10 | length 4.7
  Top Layer w0.102: U5.G10 7.025,9.085 7.1,9.16 7.66,9.16 8.1,9.6 8.1,9.916 8.295,10.112 8.295,11.775 8.14,11.931 U4.4
lsm_SCL: U4.13 U5.A7 | length 4.2
  Top Layer w0.102: v1@4.657,7.654 U5.A7 v1@4.657,7.654
  sig1 w0.102: v1@4.657,7.654 4.647,7.664 4.647,8.211 4.949,8.512 4.949,9.46 5.162,9.673 5.303,9.673 5.305,9.675 6.158,9.675 6.218,9.734 6.218,10.03 v1(6.215,10.033)
  other v1: 4.64,7.654
lsm_SDA: U4.14 U5.E10 | length 1.5
  Top Layer w0.102: U5.E10 6.325,9.073 6.715,9.463 6.715,9.615 U4.14
lsm_SDO: U4.1 U5.F10 | length 2.5
  Top Layer w0.102: U5.F10 6.675,8.732 6.675,9.135 6.908,9.368 7.31,9.368 7.5,9.368 7.613,9.48 7.613,9.67 U4.1
NetANT1_1: ANT1.1 L1.2 | length 3.3
  Top Layer w0.178: L1.2 6.325,1.249 ccw(c6.874,1.249) 6.874,0.7 ANT1.1
NetC7_1: C7.1 U3.28
  other v1: 11.7,5.891
NetC12_1: C12.1 U5.A1 Y1.1 | length 3.7
  Top Layer w0.152: C12.1@4.1,2.25 4.1,2.35 4.4,2.65 Y1.1 4.4,3.373 4.925,3.898 4.925,5.526 4.949,5.55 U5.A1@4.95,5.55
NetC13_1: C13.1 U5.A2 Y1.3 | length 2.5
  Top Layer w0.152: Y1.3 3.8,4.548 C13.1 C13.1@3.8,5.35 ; C13.1@3.8,5.3 3.8,5.348 4.356,5.904 U5.A2
NetC14_1: C14.1 U5.A8 U5.C2 | length 3.7
  Top Layer w0.102: C14.1 3.931,8.004 v1(4.925,8.004)
  sig1 w0.102: v1@4.935,7.994 v1(4.925,8.004) 4.925,6.087 5.108,5.904 v1(5.625,5.904)
NetC15_1: C15.1 U5.A10 | length 2
  Top Layer w0.152: C15.1 4.8,9.773 4.925,9.648 U5.A10
NetC18_2: C18.2 L1.1 L2.2 | length 1.6
  Top Layer w0.178: L1.1 C18.2 L2.2
NetC23_1: C23.1 U5.F2 | length 3
  Top Layer w0.2: C23.1 7.879,4.607 8.071,4.607 8.19,4.488 v1(8.204,4.488)
  PWR w0.2: v1(6.675,5.904) 7.093,5.486 8.078,5.486 8.204,5.36 v1(8.204,4.488)
NetC29_1: C29.1 U6.B3 | length 1.4
  Bottom Layer w0.152: U6.B3@4.05,1.165 U6.B3 4.05,0.179 4.229,0 C29.1 C29.1@4.3,0
NetLED1_1: LED1.1 R2.2 | length 1
  Top Layer w0.152: R2.2 10.9,6.627 11.073,6.8 LED1.1
NetLED2_1: LED2.1 R10.2 | length 0.7
  Top Layer w0.102: LED2.1 3.7,6.1 3.9,6.3 R10.2
NetR15_1: R15.1 U6.B1 | length 0.9
  Bottom Layer w0.152: R15.1@3.95,3.04 4.026,2.964 4.026,2.224 U6.B1
nRESET: pad.2@12.393,8 R3.1 U5.K6 | length 6.4
  Top Layer w0.102: U5.K6 8.346,7.304 v1(9.1,6.55) ; R3.1 11.702,8.4 12.152,7.95 pad.2@12.4,7.95
  sig1 w0.102: v1(9.1,6.55) 9.25,6.7 11.05,6.7 12.35,8 v1(12.393,8)
PGND: C2.1 C5.1 C6.1 C7.2 C8.1 C9.1 J1.1 R11.2 R12.2 U2.2 U3.11 U3.12 U3.17 U3.29 U3.30 U3.32 U3.33 | length 12.6
  Top Layer w0.2: U2.2@9.45,8.65 U2.2@9.45,8.6 ; v1(9.45,13.14) v1(9.95,13.14) 10.058,13.14 10.177,13.021 v1(10.177,12.366) v1(10.965,12.366) ; v1@9.725,8.375 10.188,8.375 ; R11.2 C2.1 9.775,7.575 9.775,8 9.78,8.005 U2.2@9.78,8.16 ; U2.2@9.8,8.15 U2.2@9.79,8.16 ; R12.2 10.575,8.375 10.188,8.375 ; v1(11.7,11.391) v1@11.714,11.391 ; U2.2@9.45,8.6 9.45,8.5 U2.2@9.78,8.17 ; U2.2@9.45,8.6 v1(9.7,8.35) v1@9.78,8.27 ; U2.2@9.78,8.16 U2.2@9.79,8.16 ; U2.2@9.78,8.16 U2.2@9.78,8.17 ; U2.2@9.78,8.17 v1@9.78,8.27 ; U2.2@9.78,8.17 U2.2@9.79,8.16 ; v1@9.78,8.27 9.8,8.29 10.09,8.29 10.1,8.3 v1@10.108,8.3 ; U2.2@9.79,8.16 9.968,8.16 v1@10.108,8.3 ; v1@10.108,8.3 10.114,8.3 10.188,8.375
  Bottom Layer w0.2: 7.549,8.023 7.572,8 8.05,8 ; 7.877,7.273 7.886,7.281 8.281,7.281 8.3,7.3 ; 9.8,11.7 9.805,11.705 9.805,12.095 9.8,12.1
  Bottom Layer w0.254: U3.33@8.952,5.142 U3.33 8.95,5.692 9.106,5.848 9.601,5.848 ; U3.32 9.452,5.142 9.452,5.699 9.601,5.848 ; U3.30 10.448,5.142 10.448,5.832 10.432,5.848 ; U3.29@10.952,5.138 U3.29 10.948,5.142 10.948,5.602 10.702,5.848 10.432,5.848 ; 9.601,5.848 10.432,5.848
  other v1: 12.15,4.15 11.7,5.391 10,8.3
ref: J1.18 U3.10 | length 14.4
  sig1 w0.152: J1.18 1.142,6.11 1.447,6.11 2.799,6.11 3.065,6.376 3.065,11.972 3.362,12.269 8.689,12.269 8.95,12.53 v1(8.95,13.14)
RHD_3V3: C2.2 C5.2 C6.2 C8.2 C9.2 U2.1 U3.13 U3.14 U3.15 U3.16 U3.26 U3.31 | length 32.4
  Top Layer w0.152: v1(11.688,11.878) v1@11.7,11.89
  Top Layer w0.25: v1(9.12,8.16) 9.12,7.63 C2.2@9.2,7.55
  PWR w0.25: 9,8.05 9.23,8.05 ; 11.45,8.4 11.7,8.15 ; 11.7,8.4 10.95,8.4 10.508,7.958 ; 11.7,8.65 11.65,8.6 11.45,8.6 ; 11.7,8.9 11.7,8.85 11.45,8.6 ; v1(9.12,8.16) 9.23,8.05 ; v1(9.12,8.16) 9.24,8.16 9.442,7.958 ; v1(9.12,8.16) 8.91,8.16 8.9,8.15 v1(8.9,7.9) 9.5,7.9 ; 9.23,8.05 9.322,7.958 9.442,7.958 ; 9.442,7.958 9.452,7.948 ; 9.452,7.948 9.5,7.9 ; 9.452,7.948 10.298,7.948 ; 9.5,7.9 10.25,7.9 ; 10.25,7.9 10.298,7.948 ; 10.25,7.9 10.45,7.9 10.508,7.958 ; 10.298,7.948 10.308,7.958 ; 10.308,7.958 10.95,8.6 11.45,8.6 ; 10.308,7.958 10.508,7.958
  PWR w0.3: v1(10.177,11.866) 10.5,11.871 10.6,11.873 ; 10.95,11.65 10.95,11.31 11.13,11.13 ; v1(10.95,13.14) 11.31,13.14 11.55,12.9 ; 11.2,11.65 11.422,11.872 ; v1(12.15,4.65) 12.15,6.441 11.7,6.891 11.7,8.4 11.7,8.65 11.7,8.85 11.7,9.91 11.375,10.235 11.375,10.885 11.13,11.13 ; 10.6,11.873 v1@10.95,11.878 ; 10.6,11.873 10.728,11.873 10.95,11.65 v1@10.95,11.878 ; v1@10.95,11.878 11.15,11.878 ; 11.13,11.13 11.15,11.15 11.15,11.878 ; 11.15,11.878 11.429,11.878 ; 11.429,11.878 11.55,12 ; 11.429,11.878 v1(11.688,11.878) 11.7,11.89 11.7,12.15 ; 11.55,12 11.7,12.15 ; 11.55,12 11.55,12.9 ; 11.55,12.9 11.7,12.75 v1(11.7,12.39) 11.7,12.15
  Bottom Layer w0.152: U3.31 9.95,4.55 10.15,4.35 11.55,4.35 11.821,4.621 12.121,4.621 v1(12.15,4.65) ; v1(10.177,11.866) 10.19,11.878 11.622,11.878 U3.16@11.65,11.85 ; 10.5,11.9 10.481,11.919 10.481,13.11 U3.13 v1(10.95,13.14) ; U3.16 v1(11.7,12.39)
  Bottom Layer w0.2: U3.26 11.71,6.9 12.283,6.9 12.4,6.783 12.4,4.9 v1(12.15,4.65)
  other v1: 11.65,6.9 10.965,11.866
rhd_CS: R9.1 U3.19 | length 1.3
  Top Layer w0.102: R9.1 10.987,11.018 11.267,11.018 11.388,10.898 11.388,10.547 11.516,10.419 v1@11.672,10.419 ; v1@11.7,10.391 v1@11.672,10.419 ; v1(11.752,10.391) 11.724,10.419 v1@11.672,10.419
rhd_MISO: R4.1 U3.25 | length 6.1
  Bottom Layer w0.102: v2(8.704,11.045) 8.742,11.007 9.005,11.007 9.09,10.922 9.09,10.3 9.39,10 10.3,10 10.521,9.779 10.521,7.771 10.521,7.729 10.65,7.6 10.85,7.4 11.691,7.4 U3.25
rhd_MOSI: R5.1 U3.23 | length 4.3
  Bottom Layer w0.102: v2(9.492,11.045) 9.793,10.743 9.793,10.407 9.95,10.25 10.35,10.25 10.725,9.875 10.725,8.515 10.833,8.407 11.098,8.407 11.684,8.407 U3.23
rhd_SCLK: R6.1 U3.21 | length 2.6
  Bottom Layer w0.102: v2(10.203,11.041) 10.587,10.657 10.587,10.414 10.937,10.064 10.937,9.541 11.087,9.391 U3.21
SPI_CS: R9.2 U5.K7 | length 5.5
  sig1 w0.102: v1(8.075,7.654) 8.325,7.404 9.854,7.404 10.965,8.515 v1(10.965,10.541)
SPI_MISO: R4.2 U5.C10 | length 4.6
  Top Layer w0.102: U5.C10 v1@5.625,9.076
  sig1 w0.102: v1(8.714,10.544) 8.714,9.832 8.473,9.591 6.491,9.591 6.3,9.4 5.905,9.4 5.697,9.191 5.697,9.189 v1@5.642,9.134 ; v1@5.642,9.134 5.625,9.117 v1(5.625,9.076) 5.642,9.094 v1@5.642,9.134
SPI_MOSI: R5.2 U5.D10 | length 5.1
  Top Layer w0.102: U5.D10 v1(5.975,9.076)
  sig1 w0.102: v1(5.975,9.076) 6.003,9.105 6.405,9.105 6.668,9.368 9.318,9.368 9.507,9.557 v1@9.507,10.538
  other v1: 9.492,10.545
SPI_SCLK: R6.2 U5.J7 | length 6
  sig1 w0.102: v1(7.725,7.654) 7.725,7.825 7.832,7.932 8.19,7.932 8.515,7.607 9.769,7.607 10.761,8.599 10.761,9.983 10.45,10.294 v1(10.203,10.541)
SWDCLK: pad.2@12.393,10 U5.H2 | length 7.6
  sig1 w0.102: v1(7.375,5.904) 7.375,6.175 7.844,6.644 8.399,6.644 8.956,7.2 9.95,7.2 11.244,8.494 11.244,9.792 11.453,10 v1(12.393,10)
SWDIO: pad.2@12.393,9 U5.J2 | length 7
  sig1 w0.102: v1@7.733,5.912 v1(7.725,5.904) 7.725,6.237 7.888,6.4 8.55,6.4 9.1,6.95 10.95,6.95 11.468,7.468 11.468,8.918 11.55,9 v1(12.393,9)
VBAT: C24.1 C25.1 P1.2 R14.1 U6.A3 | length 4.6
  Bottom Layer w0.152: C25.1 2.25,0.35 2.25,0.661 2.341,0.751 2.749,0.751 2.75,0.75 ; 2.8,0.75 2.8,0.736 2.836,0.7 3.05,0.7 ; R14.1 3.017,0.667 3.05,0.7 ; 3.1,0.35 3.425,0.675 3.5,0.75 ; 3.25,0.95 U6.A3@3.5,1.2 ; U6.A3@3.516,1.2 U6.A3 ; 3.65,0.7 3.65,1.066 3.55,1.166 U6.A3 ; 3.05,0.7 3.4,0.7 3.475,0.775 3.531,0.831 3.531,1.181 U6.A3
  other v1: 1.35,4.4 1.15,4.65 1.55,4.65
  other v2: 1.85,1.55 2.25,1.55 2.65,1.55
VBUS: C28.1 P2.2 U6.A1 | length 4
  Bottom Layer w0.152: 2.35,2.55 2.55,2.75 2.55,3.05 2.7,3.2 3.6,3.2 3.65,3.15 3.65,2.3 U6.A1@3.574,2.224 ; 3.3,2.45 U6.A1 ; C28.1 3.536,2.964 3.536,2.814 3.55,2.8 ; 3.55,2.524 U6.A1 ; 3.574,2.524 U6.A1@3.574,2.224 ; U6.A1 U6.A1@3.574,2.224
VSYS: C3.2 C4.2 C26.1 C27.1 U1.3 U1.4 U2.3 U2.4 U6.A2 | length 19.9
  Top Layer w0.152: C27.1 3.272,0.05 3.649,0.427 3.75,0.427 ; 3.54,1.5 3.71,1.33 3.682,1.302 ; 3.75,1.5 3.75,1.49 3.82,1.42 ; 3.8,0.7 3.8,1.4 cw(c3.82,1.4) 3.82,1.42 ; U1.4@3.882,0.698 U1.3@3.882,1.302 ; U1.3 3.82,1.42
  Top Layer w0.25: 4,0.55 4.191,0.359 ; 4.191,0.359 4.3,0.25 4.3,0.037 4.263,0 C26.1 4.228,0 4.191,0.037 4.191,0.359
  PWR w0.25: v1(3.2,1.9) 3.2,1.923 3.339,2.061 ; v1(3.55,1.7) 3.55,2.05 ; v1(10.15,9.25) v1(9.8,9.25) 6.785,9.25 6.512,9.523 5.3,9.523 4.925,9.148 4.925,8.548 4.221,7.843 4.221,5.529 4.65,5.1 4.65,3.373 3.55,2.273 ; 3.339,2.061 3.35,2.05 ; 3.339,2.061 3.55,2.273 ; 3.35,2.05 3.4,2 3.4,1.55 ; 3.35,2.05 3.216,1.916 v1(3.216,1.544) 3.222,1.55 3.4,1.55 ; 3.4,1.55 3.55,1.55 3.55,2.05 ; 3.55,2.05 3.55,2.273
pads on no net: ANT1.2 R13.2 U3.18 U3.20 U3.22 U3.24 U3.27 U3.34 U3.35 U3.36 U3.37 U3.38 U3.39 U3.40 U3.41 U3.42 U3.43 U3.44 U3.45 U3.46 U3.47 U3.48 U3.49 U4.9 U4.10 U4.11 U5.A3 U5.A4 U5.A9 U5.B4 U5.B5 U5.B6 U5.B9 U5.B10 U5.C5 U5.C6 U5.C7 U5.C8 U5.C9 U5.D9 U5.E2 U5.E3 U5.E9 U5.F1 U5.F3 U5.F9 U5.G1 U5.G2 U5.G3 U5.G9 U5.H1 U5.H4 U5.H5 U5.H6 U5.H7 U5.H8 U5.H9 U5.J1 U5.J3 U5.J4 U5.J5 U5.J6 U5.J8 U5.K4 U5.K8 U5.K9
copper on no net: | length 1.2
  Top Layer w0.5: 11.35,1.217 11.35,2.25 ; 11.85,0.7 11.95,0.8

## Polygon pours and split planes (outlines as drawn)
GND on Bottom Layer "Bottom Layer-GND" (solid, remove dead copper, pour order 14): 0.5,14 0.5,-0.5 13,-0.5 13,14
PGND on Bottom Layer "Bottom Layer-PGND" (hatched Horizontal grid 0.15 track 0.2, remove dead copper, pour order 0): 0.55,3.95 1.25,3.95 2.3,5 12.6,5 13,5.4 13,14 0.5,14
+3V3 on PWR "PWR-GND" (hatched Horizontal grid 0.15 track 0.2, remove dead copper, pour order 12): 0.5,14 0.5,-0.5 13,-0.5 13,14
VBAT on PWR "PWR-VBAT" (solid, remove dead copper, pour order 8): 3.05,-0.5 3.05,5 -0.1,5 -0.1,-0.55
no net on PWR "PWR-No Net" (hatched Horizontal grid 0.15 track 0.2, remove dead copper, pour order 16): 1.75,3.9
GND on GND1 "GND1-GND" (hatched Horizontal grid 0.15 track 0.2, remove dead copper, pour order 2): 0.5,14 0.5,-0.5 13,-0.5 13,14
GND on Top Layer "Top Layer-GND" (hatched Horizontal grid 0.15 track 0.2, remove dead copper, pour order 6): 0.5,14 0.5,-0.5 13,-0.5 13,14
GND on sig1 "sig1-GND" (hatched Horizontal grid 0.15 track 0.2, remove dead copper, pour order 10): 0.5,14 0.5,-0.5 13,-0.5 13,14
PGND on GND2 "GND2-GND" (hatched Horizontal grid 0.15 track 0.2, remove dead copper, pour order 4): 0.5,14 0.5,-0.5 13,-0.5 13,14

## Keep-outs
Keep-Out Layer:
  pour cut-out: 6.5,-0.5 13,-0.5 13,3.886 6.5,3.886
  lines w0.254: 0,-0.5 13,-0.5 13,14 0,14 0,-0.5

## Other copper
Top Layer:
  region net VBAT: 1.85,4.8 0.95,4.8 0.95,4.25 1.85,4.25
  rectangle net VSYS: 3.05,-0.15 3.5,0.673
  region net RHD_3V3: 8.7,8.4 8.7,7.5 8.8,7.4 9.4,7.4 9.4,8.05 9.05,8.4
  region net VSYS: 9.05,9.1 10.45,9.1 10.5,9.15 10.5,9.85 10.2,9.85 10.1,9.75 10.1,9.4 9.15,9.4 9.05,9.3
  pour cut-out: 0,5.65 2.6,5.65 2.6,12.35 0,12.35
  pour cut-out: 5.25,5.9 5.25,2.35 5.3,2.3 7.1,2.3 7.1,5.9
  pour cut-out: 5.25,5.9
  pour cut-out: 10.05,13.3 10.05,13.8 10.4,13.8 10.4,13.3
  region net VSYS: 3.05,2.05 3.3,2.05 3.45,1.9 3.8,1.9 3.8,0.95 4.2,0.55 4.2,0.35 3.05,0.35
  region net +3V3: 4.622,0.424 4.622,0.572 5.036,0.986 5.65,0.986 5.65,0.35 4.62,0.35
sig1:
  pour cut-out: 0,5.65 2.6,5.65 2.6,12.35 0,12.35
  pour cut-out: 10.2,13.1 10.2,13.8 9.7,13.8 9.7,13.1
PWR:
  region: 1.75,3.9
  pour cut-out: 5.65,4.7 5.65,-0.5 13,-0.5 13,4.7 5.673,4.7
  pour cut-out: 3.98,12.1 3.98,5.18 3.55,4.75 0,4.75 0,14 13,14 13,12.1
Bottom Layer:
  rectangle net VBUS: 1.6,2.325 3.139,3.276
  region net VBAT: 1.65,1.75 1.65,1.25 2.1,0.8 2.1,0.65 3.058,0.65 3.414,1.007 3.414,1.234 2.916,1.234 2.85,1.3 2.85,1.75
  region net GND: 1.65,1.75
  region net VBAT: 3.7,1.05 3.7,0.65 3.6,0.55 3.2,0.55 3.2,-0.1 3.15,-0.15 2.05,-0.15 2.05,0.9 3.1,0.9 3.25,1.05
  region net VBUS: 1.6,2.65 1.6,2 2.8,2 3.1,2.3 3.7,2.3 3.7,3.2 3.65,3.25 2.7,3.25 2.55,3.1 2.55,2.7 2.5,2.65
  pour cut-out: 0,5.65 2.6,5.65 2.6,12.35 0,12.35
  region: 1.4,1.2
  region net VSYS: 3.05,1.4 3.3,1.4 3.45,1.55 3.7,1.55 3.7,1.95 3.35,1.95 3.25,2.05 3.05,2.05

## Silkscreen, mask and mechanical layers (free items; w line width, h text height)
Top Overlay:
  text "GND" at 1.4,12.5 h0.6
  text "8-15" at 3.4,12.1 h0.6 r270
  text "7-0" at 2.65,12.05 h0.6 r270
  text "GND" at 12.8,11.4 h0.6 r90
  text "GND" at 13.9,10.6 h0.76
  text "SWCLK" at 13.9,9.6 h0.76
  text "SWDIO" at 13.9,8.6 h0.76
  text "RESET" at 13.9,7.6 h0.76
  text "VCC" at 13.9,6.6 h0.76
  text "REF" at 1.5,5.45 h0.6
  text "VDD" at 12.8,5.1 h0.6 r90
  text "+" at 2.45,3.4 h0.6
  text "-" at 3.4,1.2 h0.6 r90
Bottom Overlay:
  text "CLK" at 12.9,11.6 h0.6 r90
  text "DIO" at 12.9,9.6 h0.6 r90
  text "RST" at 12.9,7.9 h0.6 r90
  text "+" at 1.35,4.3 h0.6
  text "-" at 1.45,0.5 h0.6 r270
Mechanical 15:
  region: 12.155,5.452 12.155,12.852 10.355,12.852 10.355,5.452

## Dimensions
0,14 to 13,14 on Mechanical 1
0,-0.5 to 0,14 on Mechanical 1